# Altium PCB ShieldBoard_PCB.PcbDoc
Units mil, origin at the board's own origin, x right, y up, seen from the top; angles counter-clockwise.
Board outline 2700 x 2100 mil, 2 copper layers (Top Layer, Bottom Layer), stack 22.8 mil thick; 15 components, 31 nets, 62 pads, 20 vias.
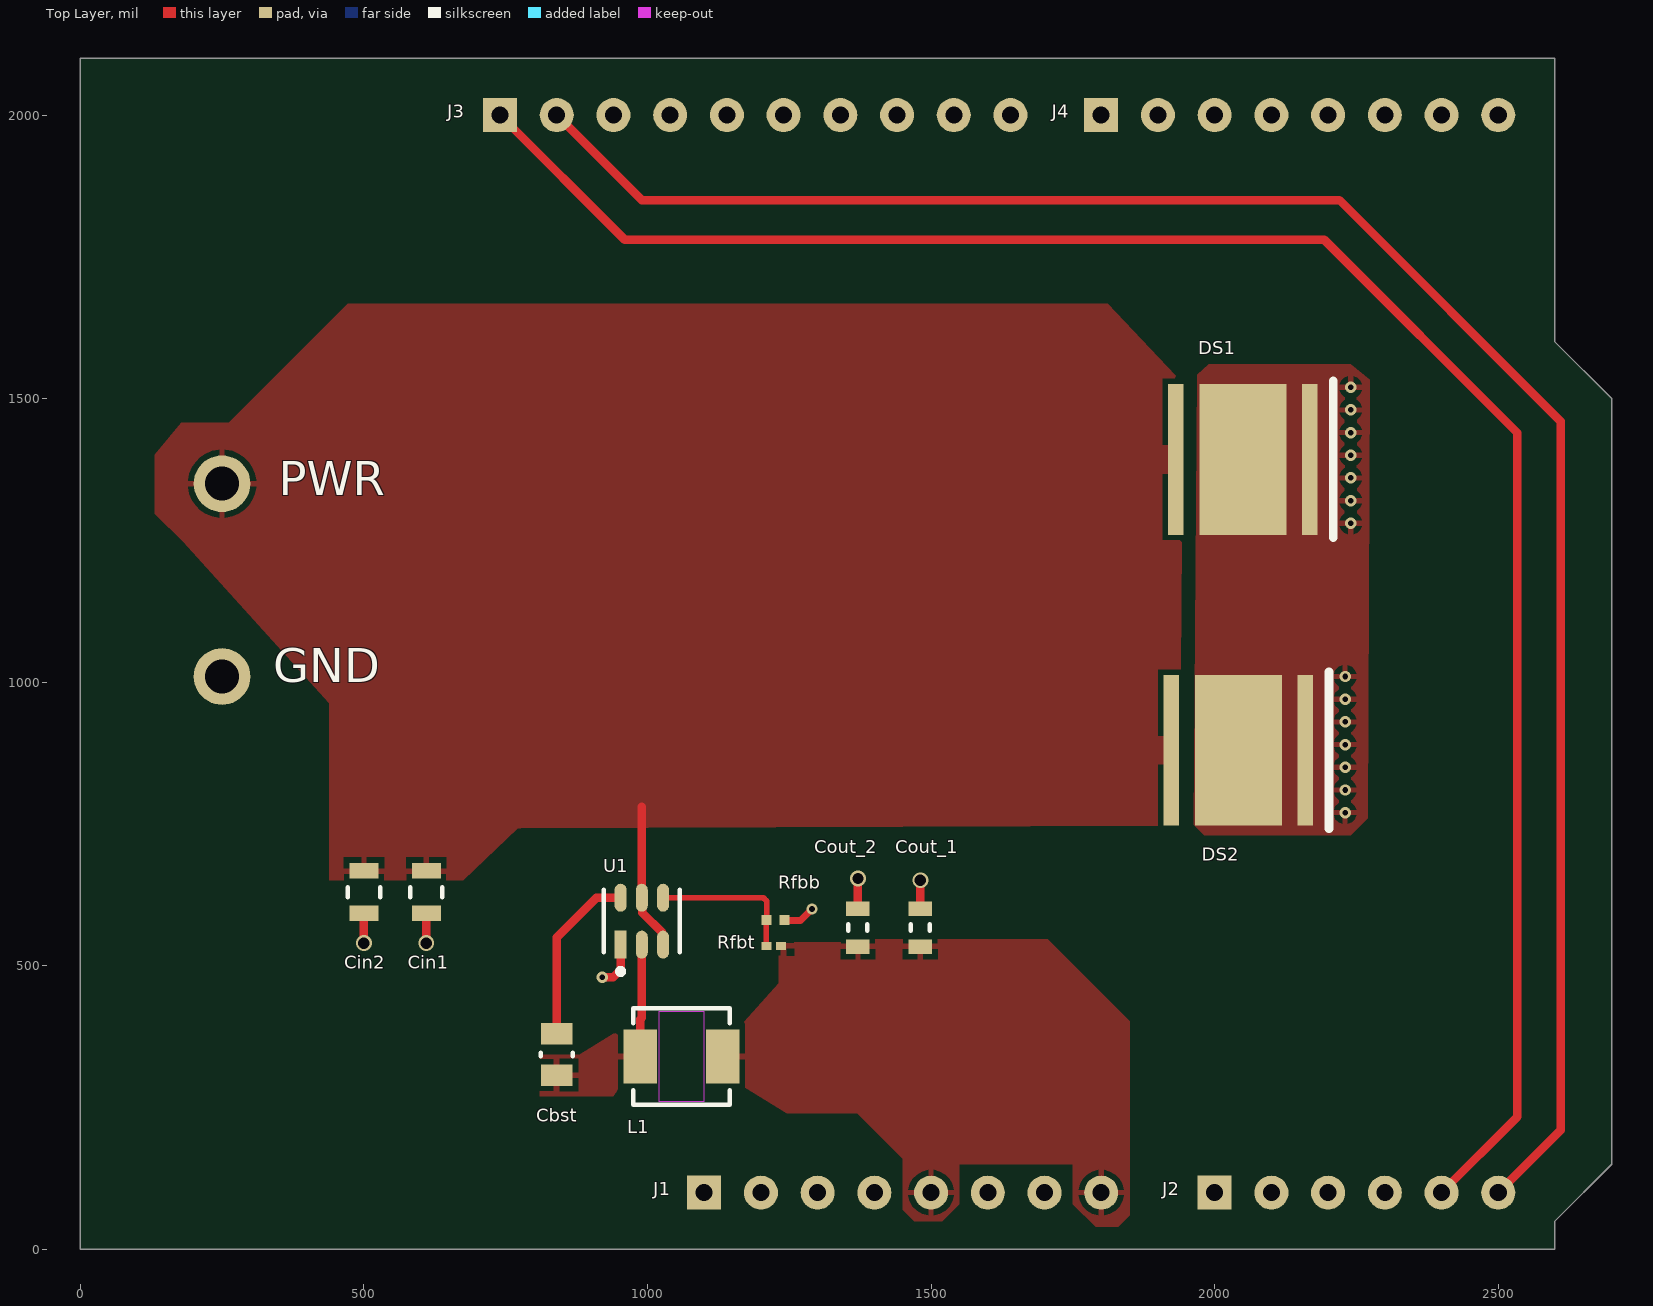
[diagram p0: Top Layer view]
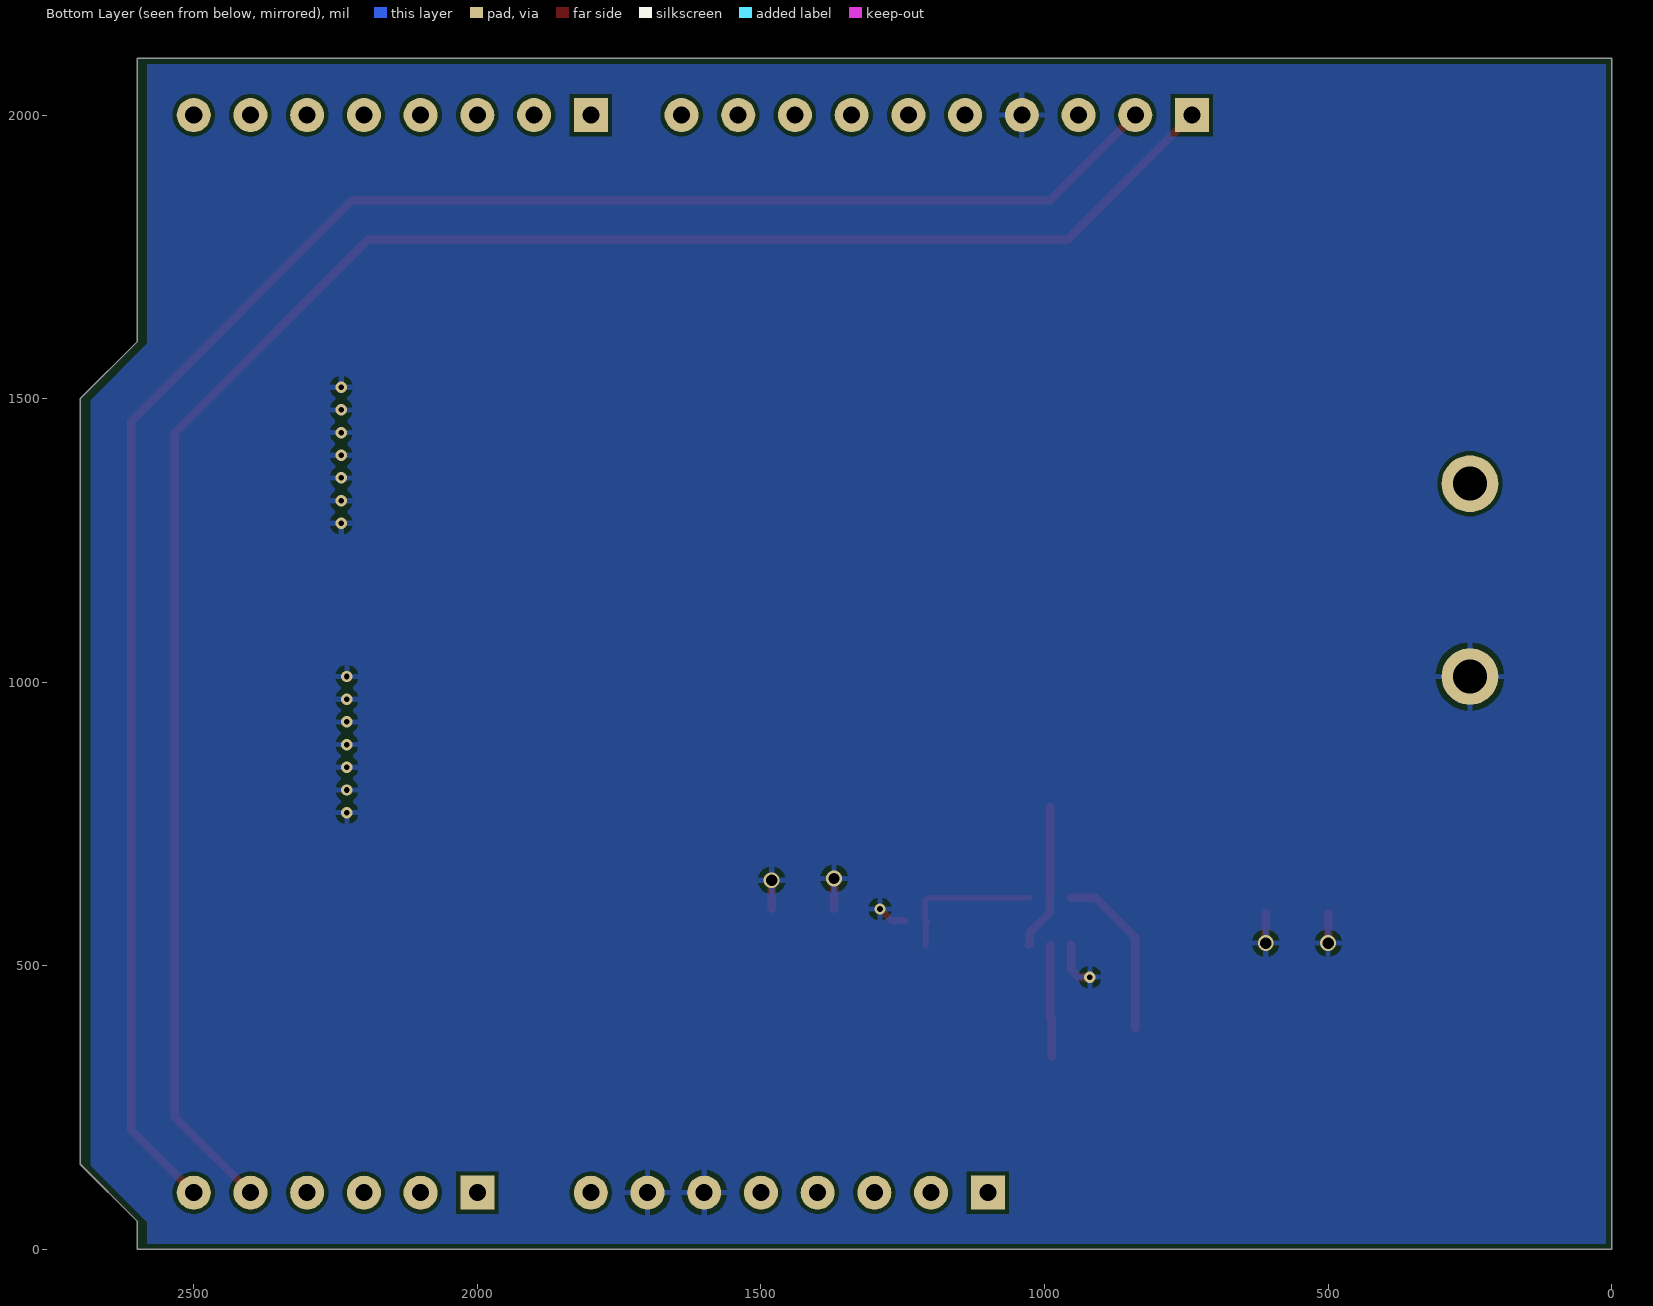
[diagram p1: Bottom Layer view, seen from below]
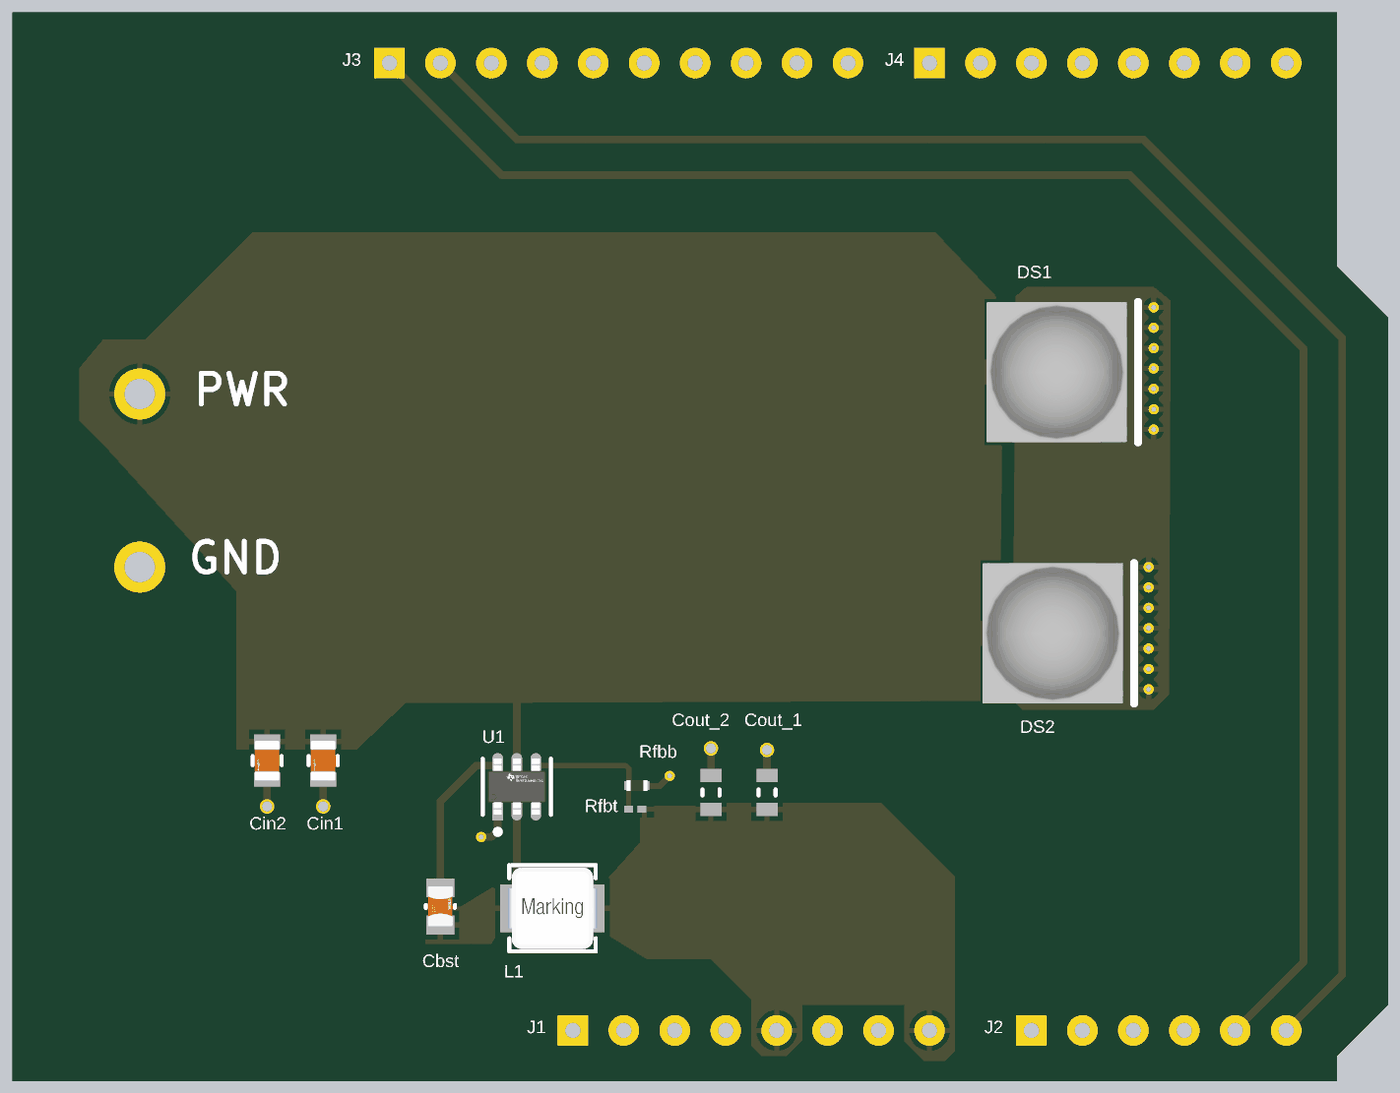
[diagram p2: 3D render of the assembled board from above, using the file's embedded part models]

## Layer stack, top to bottom
Top Solder: solder mask 0.4, Solder Resist, Dk 3.5
Top Layer: signal copper 1.4
Dielectric 1: dielectric 20, FR-4, Dk 4.8
Bottom Layer: signal copper 1.4
Bottom Solder: solder mask 0.4, Solder Resist, Dk 3.5

## Board outline
2600,1600 2700,1500 2700,150 2600,50 2600,0 0,0 0,2100 2600,2100

## Design rules (kind name [scope] priority, off if disabled: settings)
BoardOutlineClearance [All] p1: gap=10 ignorepadtopadclearanceinfootprint=FALSE
Clearance [All] p1: gap=7 ignorepadtopadclearanceinfootprint=FALSE
MinimumSolderMaskSliver [All] p1: minsoldermaskwidth=5
PolygonConnect [All] p1: connectstyle=Relief reliefconductorwidth=10 reliefentries=4 polygonreliefangle="90 Angle" airgapwidth=10
RoutingVias [All] p1: holewidth=10 width=18 viastyle="Through Hole" minholewidth=6 minwidth=14 maxholewidth=28 maxwidth=50
SilkToSolderMaskClearance [IsPad] p1: minsilkscreentomaskgap=7 clearancetoexposedcopper=TRUE
SolderMaskExpansion [All] p1: expansion=0 istentingtop=FALSE
Width [All] p1: maxlimit=30 minlimit=5 preferedwidth=10
28 further rules are at their usual default settings.

## Components (designator, comment, footprint, x,y, rotation, side; value= is the part's Value field where it differs from the comment)
Cbst "CC0805KRX7R8BB104" FP-CC0805-0_85-MFG 840,343.58 r90 top value="100 nF"
Cin1 "GRM21BR6YA106KE43L" FP-GRM21B-0_2-e0_2_0_7-MFG 610,630 r270 top (schematic designator Cin_1)
Cin2 "GRM21BR6YA106KE43L" FP-GRM21B-0_2-e0_2_0_7-MFG 500,630 r270 top (schematic designator Cin_2)
Cout_1 "C1608X5R1A226M080AC" CAPC1608X100X20ML10 1481.05,567.42 r270 top
Cout_2 "C1608X5R1A226M080AC" CAPC1608X100X20ML10 1371.09,567.42 r270 top
DS1 "Comment" CREE-MK-R-2_V#1 2049.68,1392.97 r0 top
DS2 "Comment" CREE-MK-R-2_V#2 2041.89,880 r0 top
J1 "8-Pin-Header" 8-Pin-Header-Footprint-1 1100,100 r0 top
J2 "6-Pin-Header" 6-Pin-Header-Footprint-1 2000,100 r0 top
J3 "10-Pin-Header" 10-Pin-Header-Footprint-1 740,2000 r0 top
J4 "8-Pin-Header" 8-Pin-Header-Footprint-1 1800,2000 r0 top
L1 "74437324033" WE-LHMI_4020 1060,340 r0 top
Rfbb "ERJ2RKF1002X" RESC1005X40X25LL05T05 1225.79,581.04 r180 top
Rfbt "CRCW020156K2FNED" RESC0603X28X15NL05T05 1222.54,534.85 r0 top
U1 "TPS562201DDCR" FP-DDC0006A-IPC_C 990,578.65 r90 top

## Footprints (in the part's own frame and the unit in brackets; to place one, negate y for a bottom-side part, rotate by r counter-clockwise, add the part's x,y. Pads: shape width x height; smd on the part's side, far side on the other; paste and mask are expansions set on the pad)
6-Pin-Header-Footprint-1 [mil]
  rect 60x60 hole 30: 1(0,0)
  round 60 hole 30: 2(100,0) 3(200,0) 4(300,0) 5(400,0) 6(500,0)
8-Pin-Header-Footprint-1 [mil]
  rect 60x60 hole 30: 1(0,0)
  round 60 hole 30: 2(100,0) 3(200,0) 4(300,0) 5(400,0) 6(500,0) 7(600,0) 8(700,0)
10-Pin-Header-Footprint-1 [mil]
  rect 60x60 hole 30: 1(0,0)
  round 60 hole 30: 2(100,0) 3(200,0) 4(300,0) 5(400,0) 6(500,0) 7(600,0) 8(700,0) 9(800,0) 10(900,0)
CAPC1608X100X20ML10 [mm] "Chip Capacitor, 2-Leads, Body 1.70x0.90mm, IPC Low Density"
  rect 0.65x1.05 smd: 1(-0.85,0) 2(0.85,0)
  silkscreen extent -0.15,-0.43 0.15,0.43, body extent -0.85,-0.45 0.85,0.45, height 1
CREE-MK-R-2_V#1 [mm] "SMD, 2-Leads, Body 7x7mm, Thermal Pad 3.9x6.76mm"
  rect 0.7x6.76 smd: 2(3,0) LED(-3,0)
  rect 3.9x6.76 smd: 3(0,0)
  silkscreen extent 4.05,-3.5 4.05,3.5, body extent -3.5,-3.5 3.5,3.5, height 4.1
CREE-MK-R-2_V#2 [mm] "SMD, 2-Leads, Body 7x7mm, Thermal Pad 3.9x6.76mm"
  rect 0.7x6.76 smd: 1(-3,0) 2(3,0)
  rect 3.9x6.76 smd: 3(0,0)
  silkscreen extent 4.05,-3.5 4.05,3.5, body extent -3.5,-3.5 3.5,3.5, height 4.1
FP-CC0805-0_85-MFG [mm]
  rect 0.95x1.4 smd paste+0 mask+0: 1(-0.925,0) 2(0.925,0)
  silkscreen extent -0.08,-0.72 0.08,0.72, body extent -1.6,-1.05 1.6,1.05, height 0.25
FP-DDC0006A-IPC_C [mm]
  rect 1.254x0.532 smd paste+0 mask+0: 1(-1.05,0.95)
  rrect100% 1.254x0.532 smd paste+0 mask+0: 2(-1.05,0) 3(-1.05,-0.95) 4(1.05,-0.95) 5(1.05,0) 6(1.05,0.95)
  silkscreen extent -2.37,-1.7 1.4,1.7, body extent -1.78,-1.55 1.78,1.55, height 0.25
FP-GRM21B-0_2-e0_2_0_7-MFG [mm]
  rect 0.7x1.3 smd paste+0 mask+0: 1(-0.95,0) 2(0.95,0)
  silkscreen extent -0.23,-0.72 0.23,0.72, body extent -1.4,-0.82 1.4,0.82, height 0.25
RESC0603X28X15NL05T05 [mm] "Chip Resistor, 2-Leads, Body 0.60x0.30mm, IPC Medium Density"
  rect 0.45x0.35 smd: 1(-0.325,0) 2(0.325,0)
  body extent -0.33,-0.17 0.33,0.18, height 0.28
RESC1005X40X25LL05T05 [mm] "Chip Resistor, 2-Leads, Body 1.05x0.55mm, IPC High Density"
  rect 0.45x0.45 smd: 1(-0.4,0) 2(0.4,0)
  body extent -0.53,-0.28 0.53,0.28, height 0.4
WE-LHMI_4020 [mm] "SMT Power Inductor, 2-Leads, body 4.06x4.06mm"
  rect 1.5x2.4 smd: 1(-1.85,0) 2(1.85,0)
  Top Layer keep-out region: -1,2.03 1,2.03 1,-2.03 -1,-2.03
  silkscreen extent -2.15,-2.15 2.15,2.15, body extent -2.22,-2.03 2.23,2.03, height 1.8

## Part data
Cbst: library part CMP-1036-04410-2, "CAP CER 0.1UF 25V X7R 0805", Capacitance="100 nF", Manufacturer=Yageo, Package=CC0805-0.85, Temperature="-30°C to +85°C", Temperature Characteristic=X7R, Temperature Range High=+85°C, Temperature Range Low=-30°C, Tolerance=0.1, Voltage Rating="25 V", Automotive=No, Category=Cap, ComponentLink2Description=Datasheet, ComponentLink2URL=http://www.yageo.com/documents/recent/UPY-GPHC_Y5V_6.3V-to-50V_8.pdf, Device Class L1="Passive Components", Device Class L2=Capacitors, Device Class L3="Ceramic Capacitors", Digikey Description="CAP CER 0.1UF 25V X7R 0805", Footprint Url=http://www.yageo.com/exep/pages/download/literatures/UPY-C_GEN_24.pdf, Height=0.95mm, Ipc Land Pattern Name=CAPC200125X85, Lead Free=Yes, Manufacturer Part Number=CC0805KRX7R8BB104, Material=Ceramic, Mouser Description="Multilayer Ceramic Capacitors MLCC - SMD/SMT 100nF 25V X7R 10%", Octopart=https://octopart.com/cc0805krx7r8bb104-yageo-39467766, RoHS=TRUE
Cin1 Cin2: library part CMP-06035-048920-1, "Chip Multilayer Ceramic Capacitors for General Purpose, 0805, 10uF, X5R, 15%, 10%, 35V", Capacitance=10uF, Case Code (Imperial)=0805, Case Code (Metric)=2012, Dielectric=X5R, Max Operating Temperature=85°C, Min Operating Temperature=-55°C, Package Quantity=3000, Tolerance=10%, Voltage Rating=35V, Case/Package=0805, Height=1.25mm, Lead Free="Lead Free", Length=0.079inch, Mount="Surface Mount", Packaging="Tape and Reel", REACH SVHC="No SVHC", Termination=SMD/SMT, Thickness=0.057inch, Voltage Rating (DC)=35V, Weight=0.000335oz, Width=0.049inch
Cout_1 Cout_2: library part CMP-2000-05441-1, "Chip Capacitor, 22 uF, +/- 20%, 10 V, -55 to 85 degC, 0603 (1608 Metric), RoHS, Tape and Reel", Capacitance=22µF, Manufacturer=TDK, Operating Temperature=-55degC~85degC, Package / Case=0603(1608Metric), Package Description="2-Pin Surface Mount Device, Body 1.6 x 0.8 mm", Package Reference=603, PCN Part Number=MLCCPartNumberChange30/Nov/2012, Ratings=-, Standard Package=1, Temperature Coefficient=X5R, Tolerance=±20%, Voltage - Rated=10V, Applications=GeneralPurpose, Category=Capacitors, Datasheet URL=http://download.siliconexpert.com/pdfs/2015/4/21/15/54/45/779/tdk_/manual/37024850441143360mlcc_commercial_general_en.pdf, Datasheet Version=Mar-15, Design Resources=20WNon-IsolatedBuckLEDDriverUsingPLLNK460KG, Family=CeramicCapacitors, Features=-, Height - Seated (Max)=-, Kits=445-9014-KIT-ND-KITMLCC100PF-22UF060310-50V, Lead Spacing=-, Lead Style=-, Manufacturer URL=http://www.tdk.com/, Mounting Type=SurfaceMount,MLCC, Online Catalog=CSeries,GeneralPurpose, Other Names=445-9077-1, Packaging=CutTape(CT), Product Training Modules=CSeriesGeneralApplicationsSEAT,CCV,andTVCLDesignToolsGuidetoReplacinganElectrolyticCapacitorwithanMLCC, RoHS Information=RoHSCertificate-MLCC, Series=C, Size / Dimension="0.063\"Lx0.031\"W(1.60mmx0.80mm)", Thickness (Max)="0.035\"(0.90mm)"
J1 J4: library part CMP-002-00073-2, "1x8 Header for arduino sheild board", Color=Black, Manufacturer Part Number=SSQ-108-03-T-S, Connector Type=Receptacle, Contact Material=Bronze, Contact Plating=Tin, Contact Type="Female Socket", Gender=Female, Height=8.51mm, Housing Color=Black, Housing Material=Plastic, Lead Free="Lead Free", Length=20.8mm, Mounting Technology="Through Hole", Number of Contacts=8, Number of Positions=8, Number of Rows=1, Packaging=Bulk, Pitch=0.1inch, Radiation Hardening=No, RoHS Compliant=Yes, Series=SSQ, Termination=Solder, Width=2.41mm
J2: library part CMP-001-00083-1, "1x6 Header for arduino shield board", Manufacturer Part Number=SSQ-106-03-T-S
J3: library part CMP-002-00074-1, "1x10 Header for arduino sheild board", Color=Black, Manufacturer Part Number=SSQ-110-03-T-S, Package Quantity=1, Connector Type=Receptacle, Contact Material=Bronze, Contact Plating=Tin, Contact Type="Female Socket", Gender=Female, Height=8.51mm, Housing Color=Black, Housing Material=Plastic, Lead Free="Lead Free", Length=25.9mm, Mounting Technology="Through Hole", Number of Contacts=10, Number of Positions=10, Number of Rows=1, Packaging=Bulk, Pitch=0.1inch, Radiation Hardening=No, RoHS Compliant=Yes, Series=SSQ, Termination=Solder, Width=2.41mm
L1: library part CMP-1353-00028-3, Ambient Temperature Range High=85°C, Ambient Temperature Range Low=-40°C, Case/Package=Nonstandard, Current Rating=2.5A, DC Resistance (DCR)=69mΩ, Frequency=40MHz, Inductance=3.3µH, Inductance Tolerance=20%, Max Operating Temperature=125°C, Saturation Current=2.75A, Series Resistance=76mΩ, Test Frequency=100kHz, Composition=Wirewound, Core Material="Composite, Ferrite", Depth=4.06mm, Height=1.8mm, Height - Seated (Max)=2.0066mm, Lead Free="Lead Free", Length=4.45mm, Max DC Current=2.5A, Min Operating Temperature=-40°C, Mount="Surface Mount", NexarPartId=21272405, Number of Pins=2, Packaging="Tape & Reel (TR)", REACH SVHC=Unknown, RMS Current (Irms)=2.5A, RoHS=Compliant, Self Resonant Frequency=40MHz, Shielding=Shielded, Termination=SMD/SMT, Tolerance=20%, Width=4.06mm
Rfbb: library part CMP-2000-07588-1, "Chip Resistor, 10 KOhm, +/- 1%, 0.1 W, -55 to 155 degC, 0402 (1005 Metric), RoHS, Tape and Reel", Case Code (Imperial)=0402, Case Code (Metric)=1005, Manufacturer=Panasonic, Max Operating Temperature=155degC, Max Power Dissipation=100mW, Min Operating Temperature=-55degC, Package Description="2-Pin Surface Mount Device, Body 1 x 0.5 mm", Package Quantity=1, Package Reference=402, Resistance=10KOhm, Temperature Coefficient=100ppm\/degreesC, Tolerance=1%, Voltage Rating=50V, Case\/Package=0402, Composition=ThickFilm, Contact Plating=Tin, Datasheet URL=https://industrial.panasonic.com/cdbs/www-data/pdf/RDA0000/AOA0000C304.pdf, Datasheet Version=02/2017, Depth=0.5mm, Height=0.35mm, Lead Free=LeadFree, Length=1mm, Manufacturer URL=http://www.panasonic.com/, Military Standard=Not, Mount=SurfaceMount, Mounting Technology=SurfaceMount, Number of Pins=2, Number of Terminations=2, Packaging=TapeandReel, Power Rating=100mW, Radiation Hardening=No, REACH SVHC=NoSVHC, RoHSCompliant=True, Termination=SMD/SMT, Voltage Rating (DC)=50V, Width=0.02inch
Rfbt: library part CMP-2004-00723-1, Manufacturer="Vishay Dale", Part Number=CRCW020156K2FNED
U1: library part CMP-04918-000361-1, "IC REG BUCK ADJ 2A TSOT23-6", Case/Package=SOT, Max Input Voltage=17V, Max Operating Temperature=125°C, Max Output Current=2A, Min Input Voltage=4.5V, Min Operating Temperature=-40°C, Output Voltage=7V, Quiescent Current=400uA, Switching Frequency=580kHz, Contact Plating=Tin, Lead Free="Lead Free", Mount="Surface Mount", Number of Outputs=1, Number of Pins=6, Operating Supply Voltage=17V, Output Type=Adjustable, RoHS Compliant=Yes

## Free pads (board coordinates)
  round 100 hole 60: 40(250,1010) 40(250,1350)

## Via types
v1: diameter 20, hole 10, Top Layer to Bottom Layer, 16 vias
v2: diameter 28, hole 20, Top Layer to Bottom Layer, 4 vias

## Nets (pads, with @x,y where several pads share a name; then routed paths per layer and width w, separated by ;. In a path a pad name is that pad's centre, name@x,y a point inside that pad or via, vN(x,y) a via of type N, cw(c..) or ccw(c..) an arc to the next point about the centre after c; other vN are vias at no path point)
3.3V: J1.4
+5: Cout_1.2 Cout_2.2 J1.5 J1.8 L1.2 Rfbt.2
+12: Cin1.1 Cin2.1 DS1.LED DS2.1 pad.40@250,1350 U1.3 U1.5 | length 258.2
  Top Layer w15: 990,780 U1.5 991.14,618.86 991.14,593.38 1026.26,558.25 1026.26,538.44 U1.3
A0: J2.1
A1: J2.2
A2: J2.3
A3: J2.4
A4: J2.5 J3.1 | length 3420.8
  Top Layer w15: J3.1 960,1780 2193.19,1780 2533.74,1439.45 2533.74,233.74 J2.5
A5: J2.6 J3.2 | length 3399.2
  Top Layer w15: J3.2 990,1850 2220,1850 2610,1460 2610,210 J2.6
AREF: J3.3
D0: J4.8
D1: J4.7
D2: J4.6
D3: J4.5
D4: J4.4
D5: J4.3
D6: J4.2
D7: J4.1
D8: J3.10
D9: J3.9
D10: J3.8
D11: J3.7
D12: J3.6
D13: J3.5
GND: Cin1.2 Cin2.2 Cout_1.1 Cout_2.1 DS1.2 DS1.3 DS2.2 DS2.3 J1.6 J1.7 J3.4 pad.40@250,1010 Rfbb.1 U1.1 | length 343.3
  Top Layer w12: Rfbb.1@1245.75,580 1270,580 v1(1290,600)
  Top Layer w15: v2(500,540) Cin2.2 ; v2(610,540) Cin1.2 ; v1(920,480) 940,480 952.6,492.6 U1.1 ; Cout_2.1 v2(1371.09,653.95) ; Cout_1.1 v2(1481.05,650.88)
  other v1: 2230,770 2230,810 2230,850 2230,890 2230,930 2230,970 2230,1010 2239.82,1280.2 2240,1320 2239.82,1360.2 2239.82,1400.2 2240,1440 2239.82,1480.2 2239.82,1520.2
IOREF: J1.2
N-C: J1.1
NetCbst_2: Cbst.2 U1.6 | length 301.6
  Top Layer w15: Cbst.2@840,390 840,550 910,620 U1.6
NetRfbb_2: Rfbb.2 Rfbt.1 U1.4 | length 261.9
  Top Layer w10: U1.4 1204.19,620 1210.05,614.14 Rfbb.2 ; Rfbb.2@1206.63,577.62 1209.5,574.76 Rfbt.1@1209.5,535.1
RESET: J1.3
SW_OUT: Cbst.1 L1.1 U1.2 | length 198.5
  Top Layer w15: L1.1 987.17,405.39 990,408.22 U1.2

## Polygon pours and split planes (outlines as drawn)
GND on Bottom Layer "GND_L02_P000" (solid, pour order 0): 2581.65,-2.59 2581.65,47.41 2681.65,147.41 2681.65,1497.41 2581.65,1597.41 2581.65,2097.41 -18.35,2097.41 -18.35,-2.59
+12 on Top Layer "+12_L01_P008" (solid, remove dead copper, pour order 8): 439.02,805.97 439.02,651.2 675.44,651.2 771.68,742.81 776.24,742.82 1937.82,747.25 1938.02,856.75 1945.31,1526.06 1811.65,1667.41 471.65,1667.41 261.65,1457.41 178.31,1457.41 131.65,1401.41 131.65,1297.41 181.65,1247.41 439.02,962.98
+5 on Top Layer "+5_L01_P014" (solid, pour order 14): 1249.87,541.16 1344.83,541.16 1350.51,546.84 1705.55,546.84 1850,402.38 1850,60 1830,40 1790,40 1750,80 1750,150 1550,150 1550,80 1520,50 1470,50 1450,70 1450,160 1370,240 1245.27,240 1103.84,326.67 1231.72,469.29 1231.72,541.13
SW_OUT on Top Layer "SW_OUT_L01_P011" (solid, pour order 11): 1016.36,387.75 960,387.75 940,380 879.64,343.24 810,343.24 810,270.08 940,270.08
GND on Top Layer "GND_L01_P005" (solid, pour order 5): 1971.36,740.46 1981.77,730.05 2020.12,730.05 2240.12,730.05 2270.12,760.05 2273.47,1533.41 2240.12,1560.21 1990,1560.21 1969.03,1542.18 1962.92,748.9

## Silkscreen, mask and mechanical layers (free items; w line width, h text height)
Top Overlay:
  text "PWR" at 350,1330 h60
  text "GND" at 340,1000 h60